# Altium PCB AltiumSTM32.PcbDoc
Units mm, origin at the board's own origin, x right, y up, seen from the top; angles counter-clockwise.
Board outline 36 x 37 mm, 4 copper layers (L1 (Signal), L2 (GND), L3 (GND), L4 (Signal)), stack 1.57 mm thick; 35 components, 27 nets, 172 pads, 111 vias.
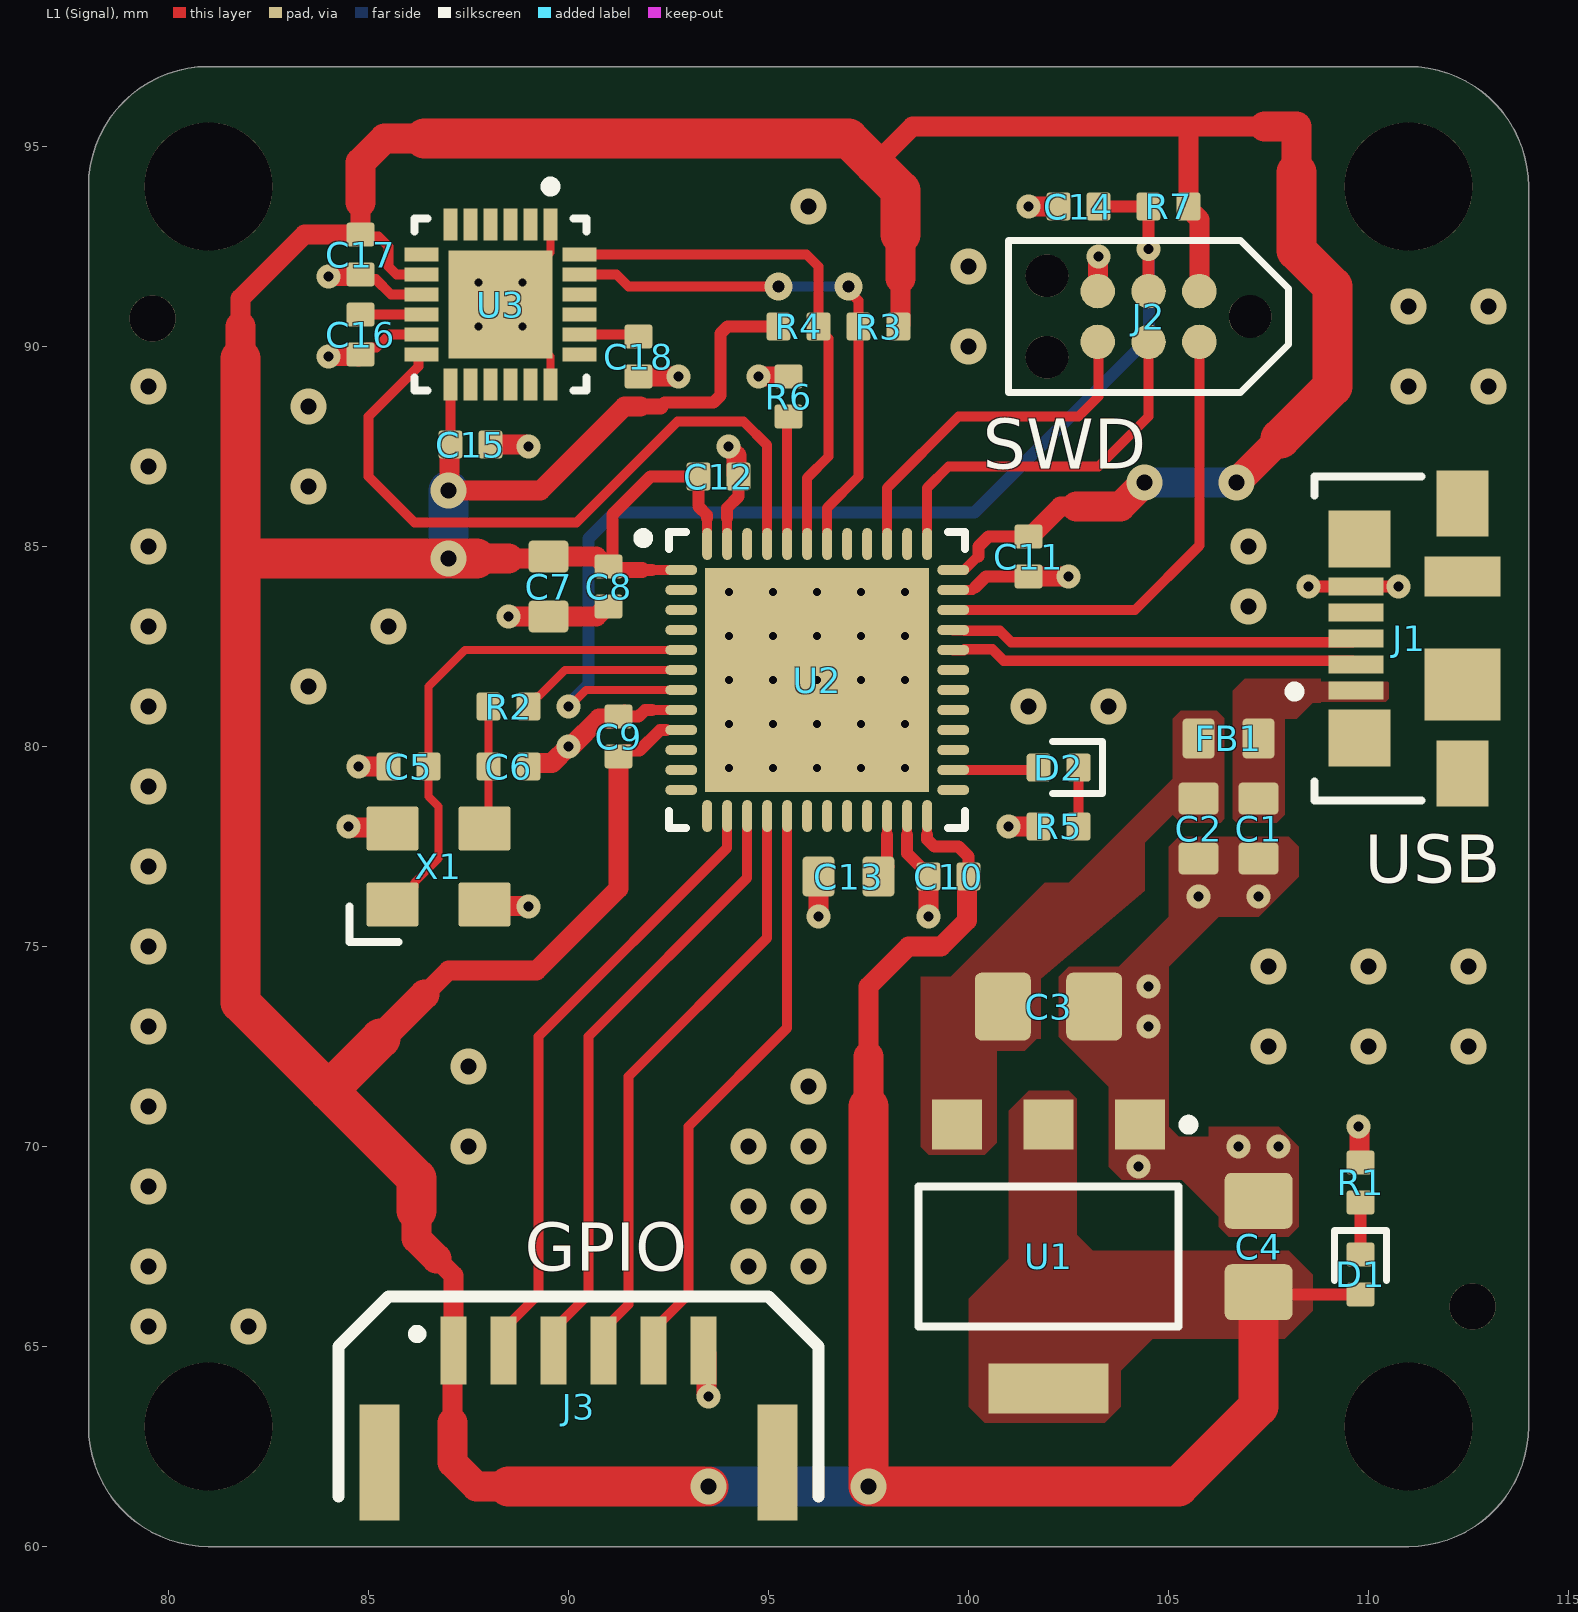
[diagram p0: L1 (Signal) view]
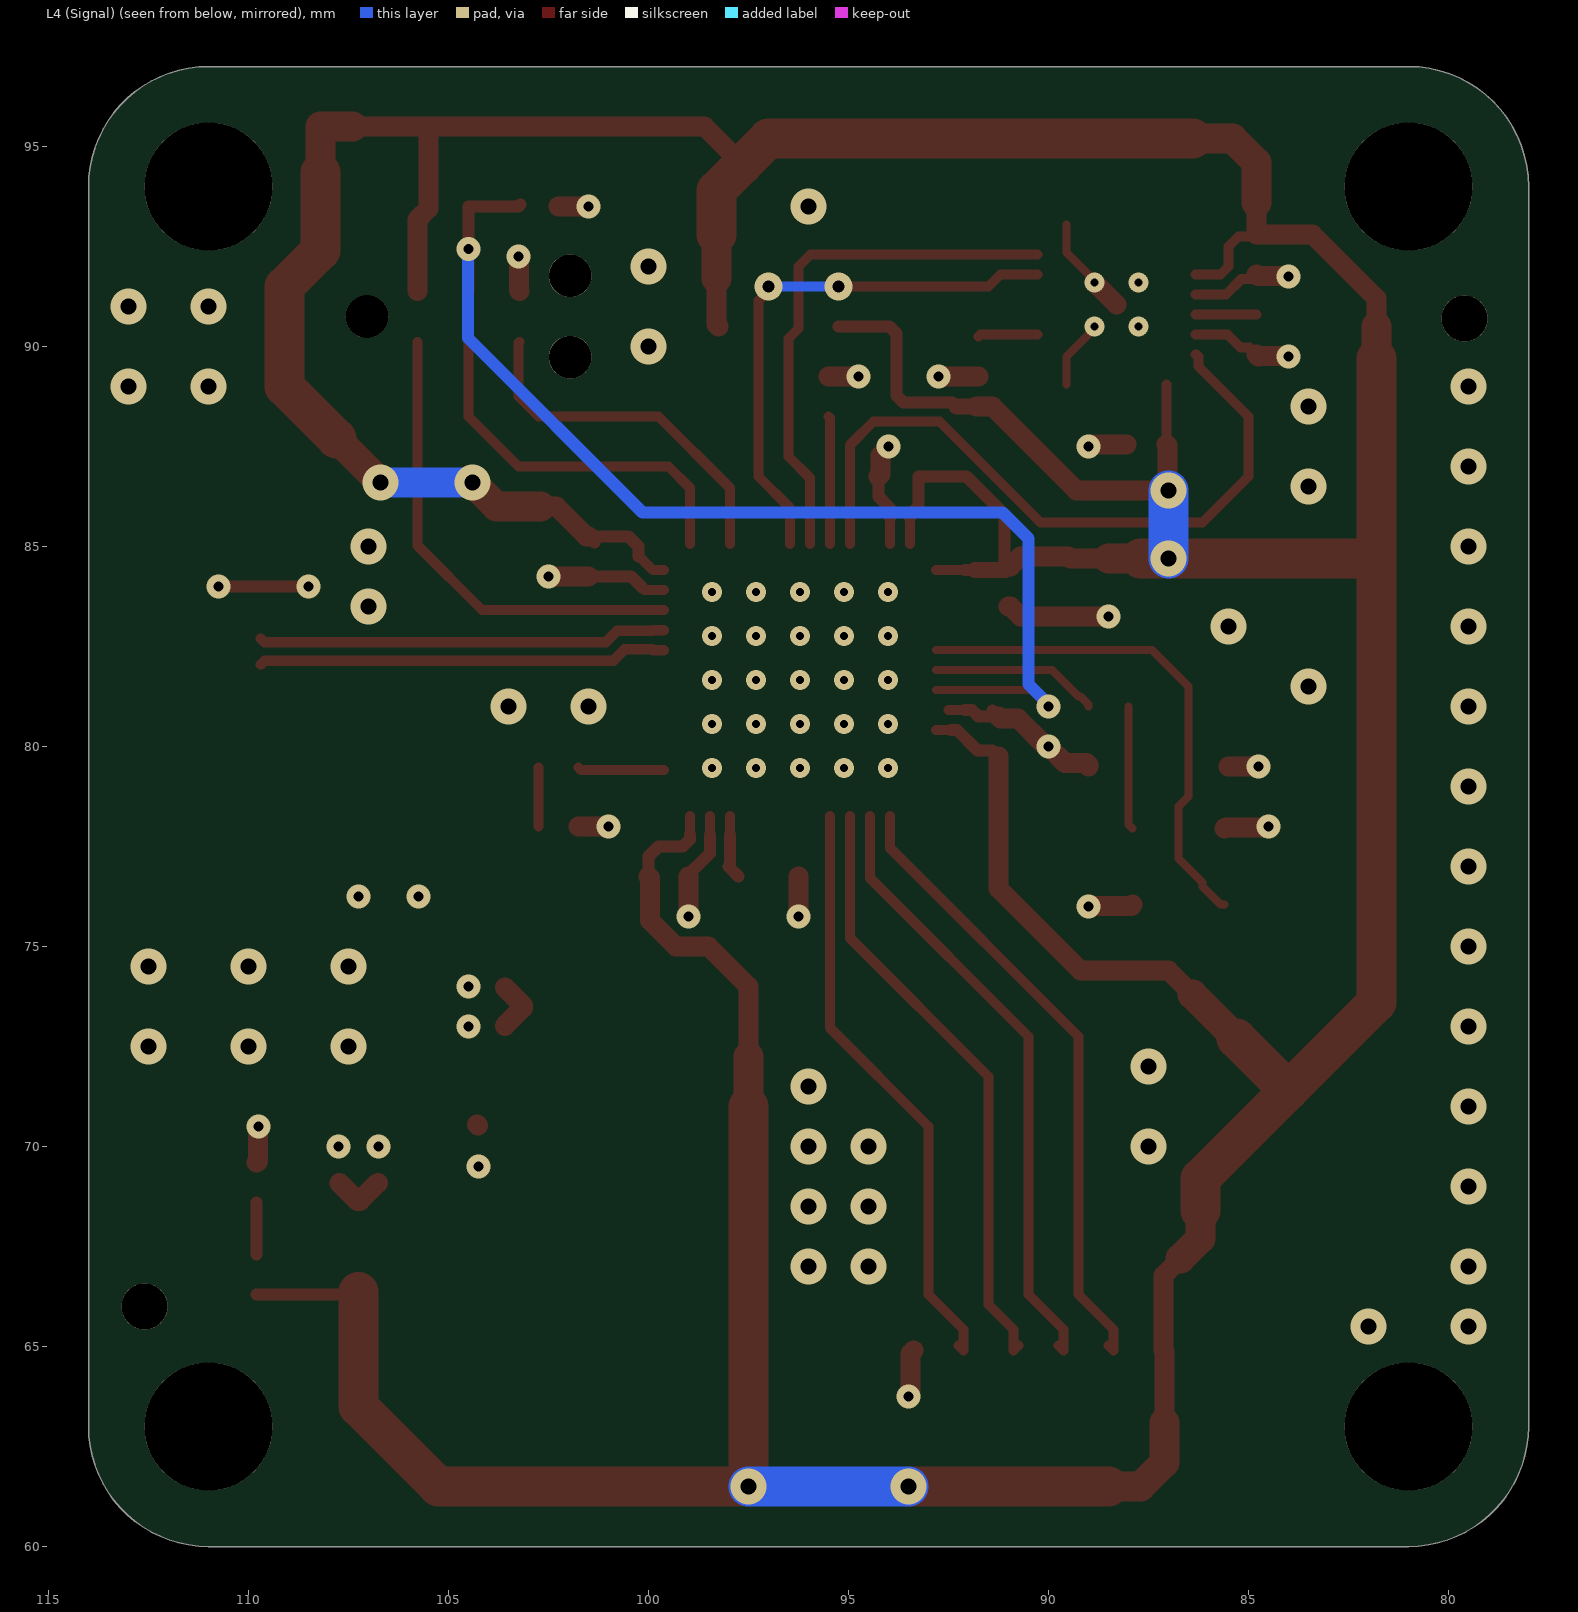
[diagram p1: L4 (Signal) view, seen from below]
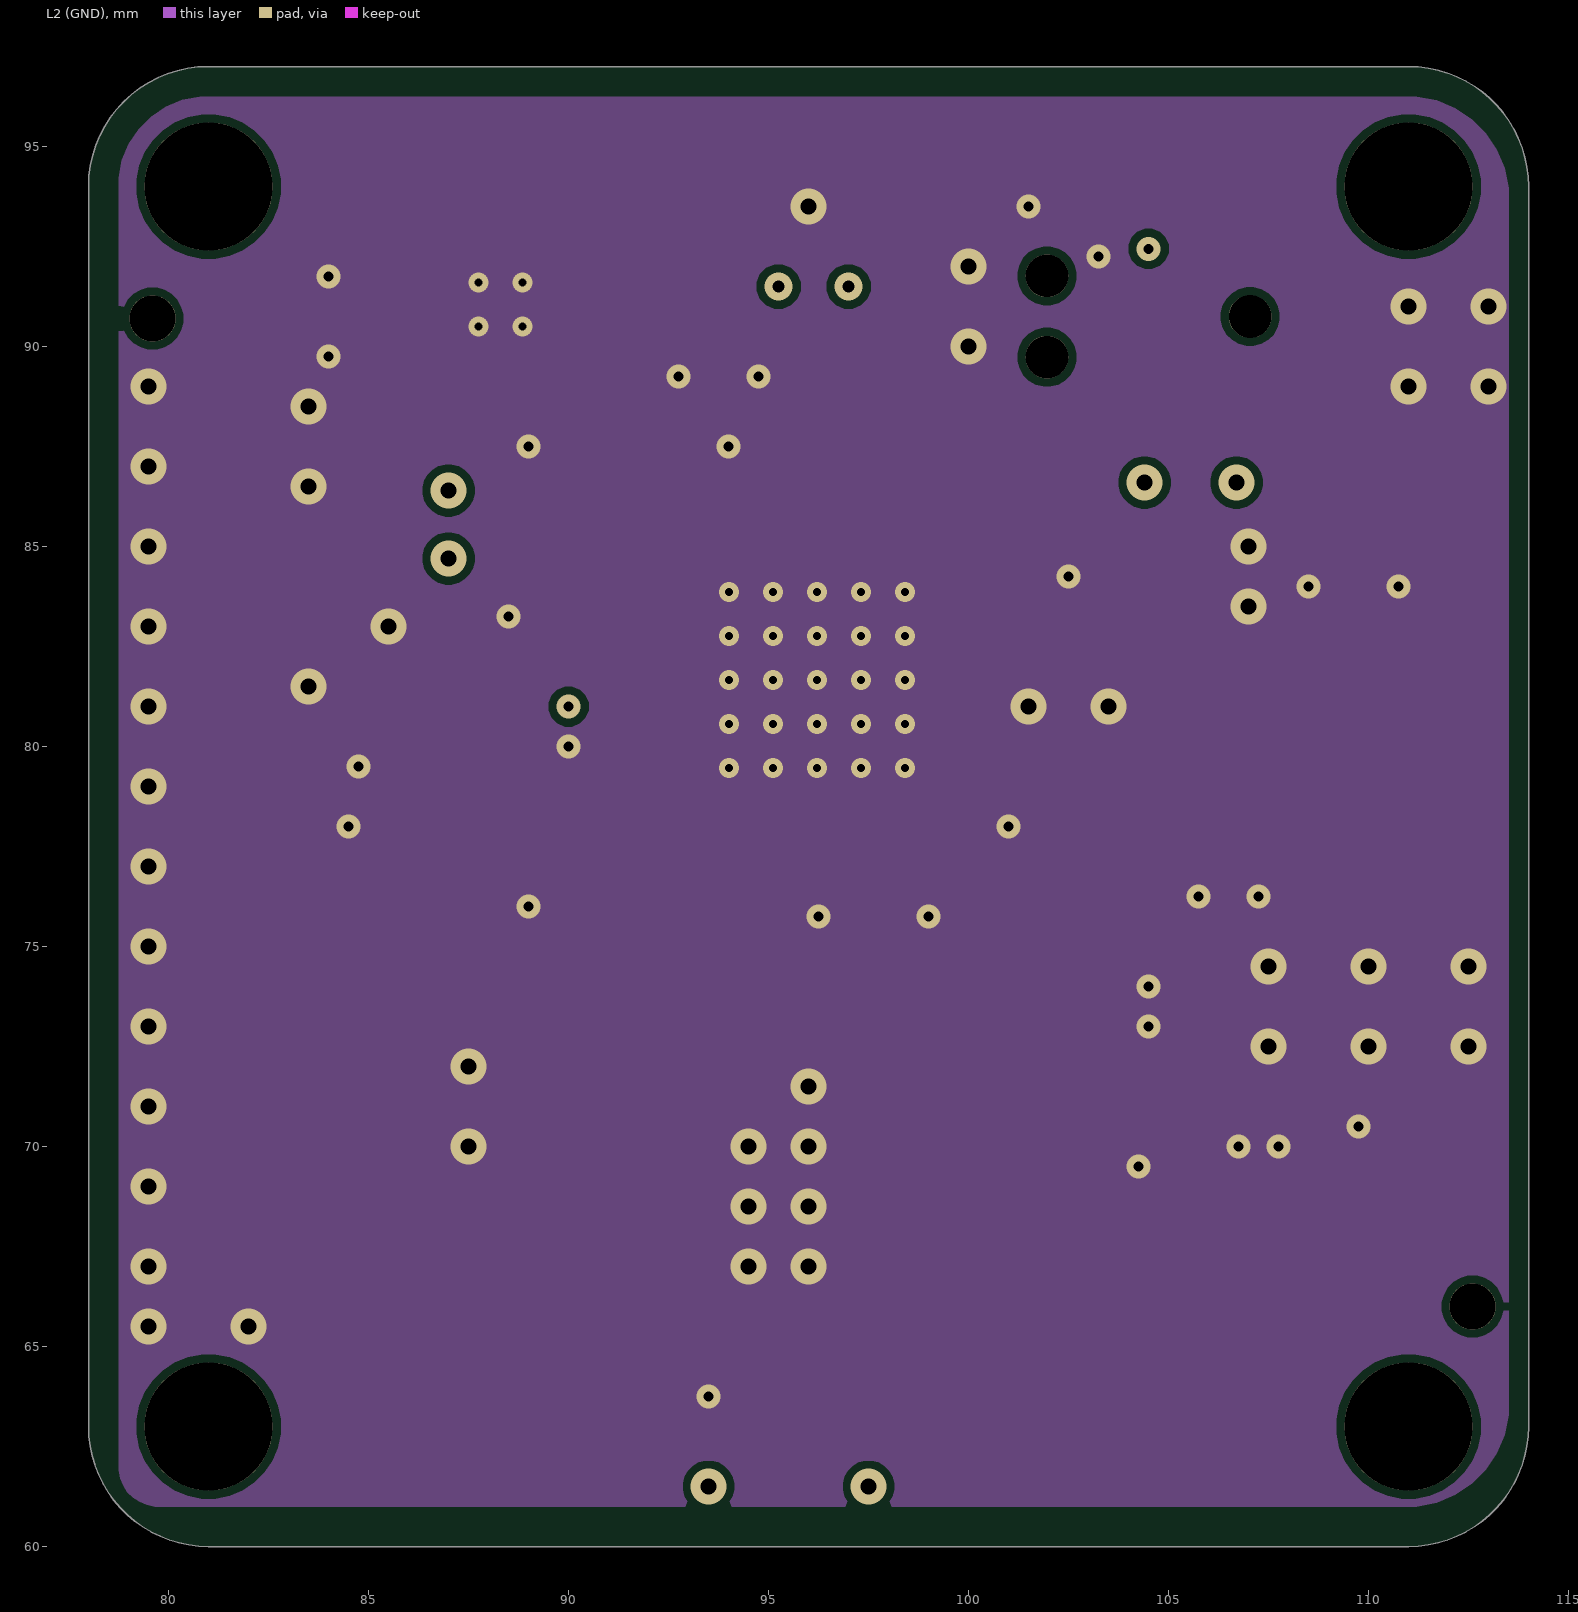
[diagram p2: L2 (GND)]
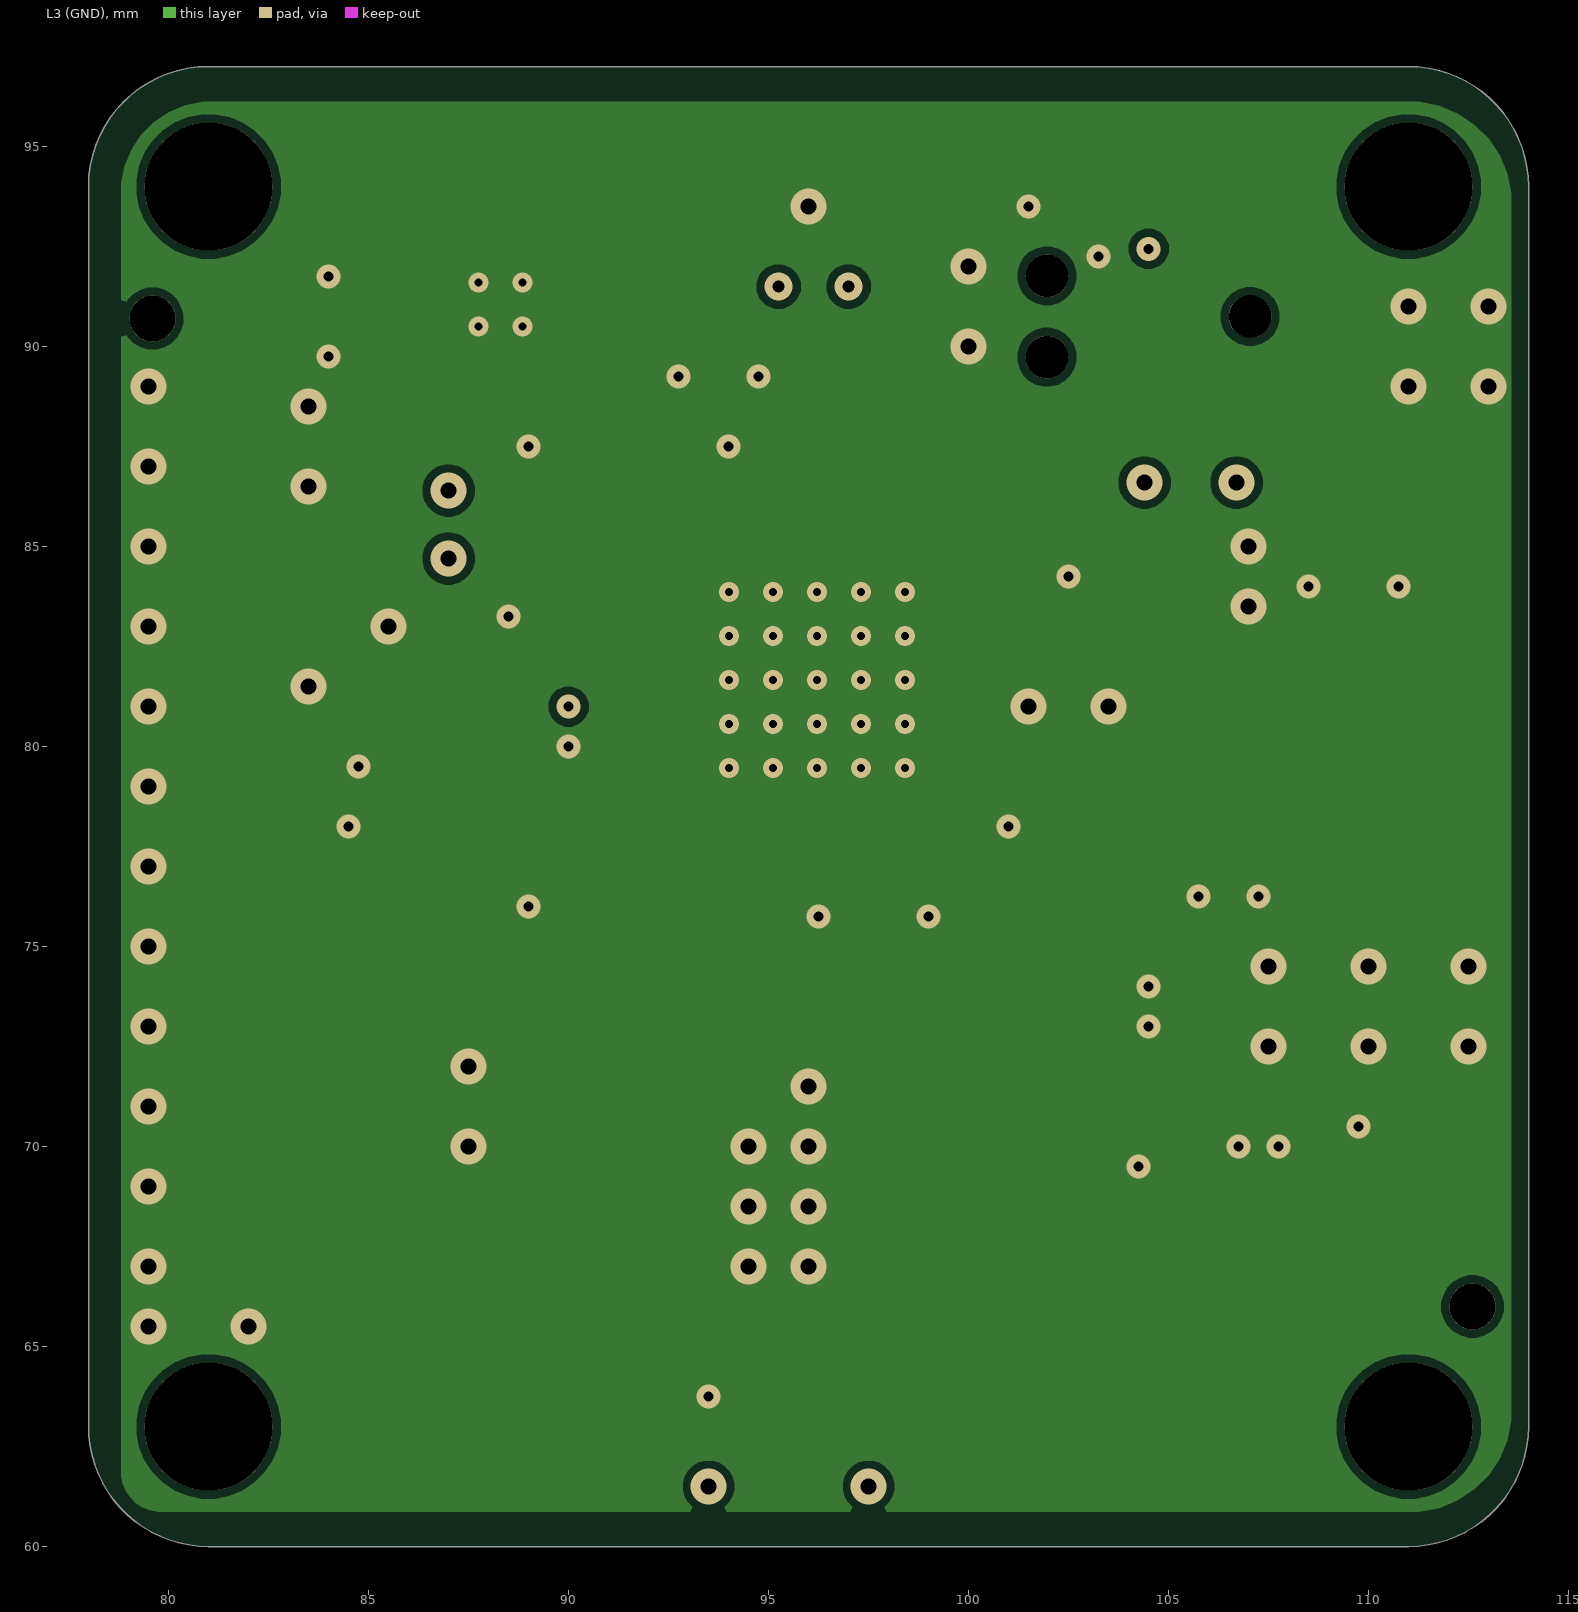
[diagram p3: L3 (GND)]
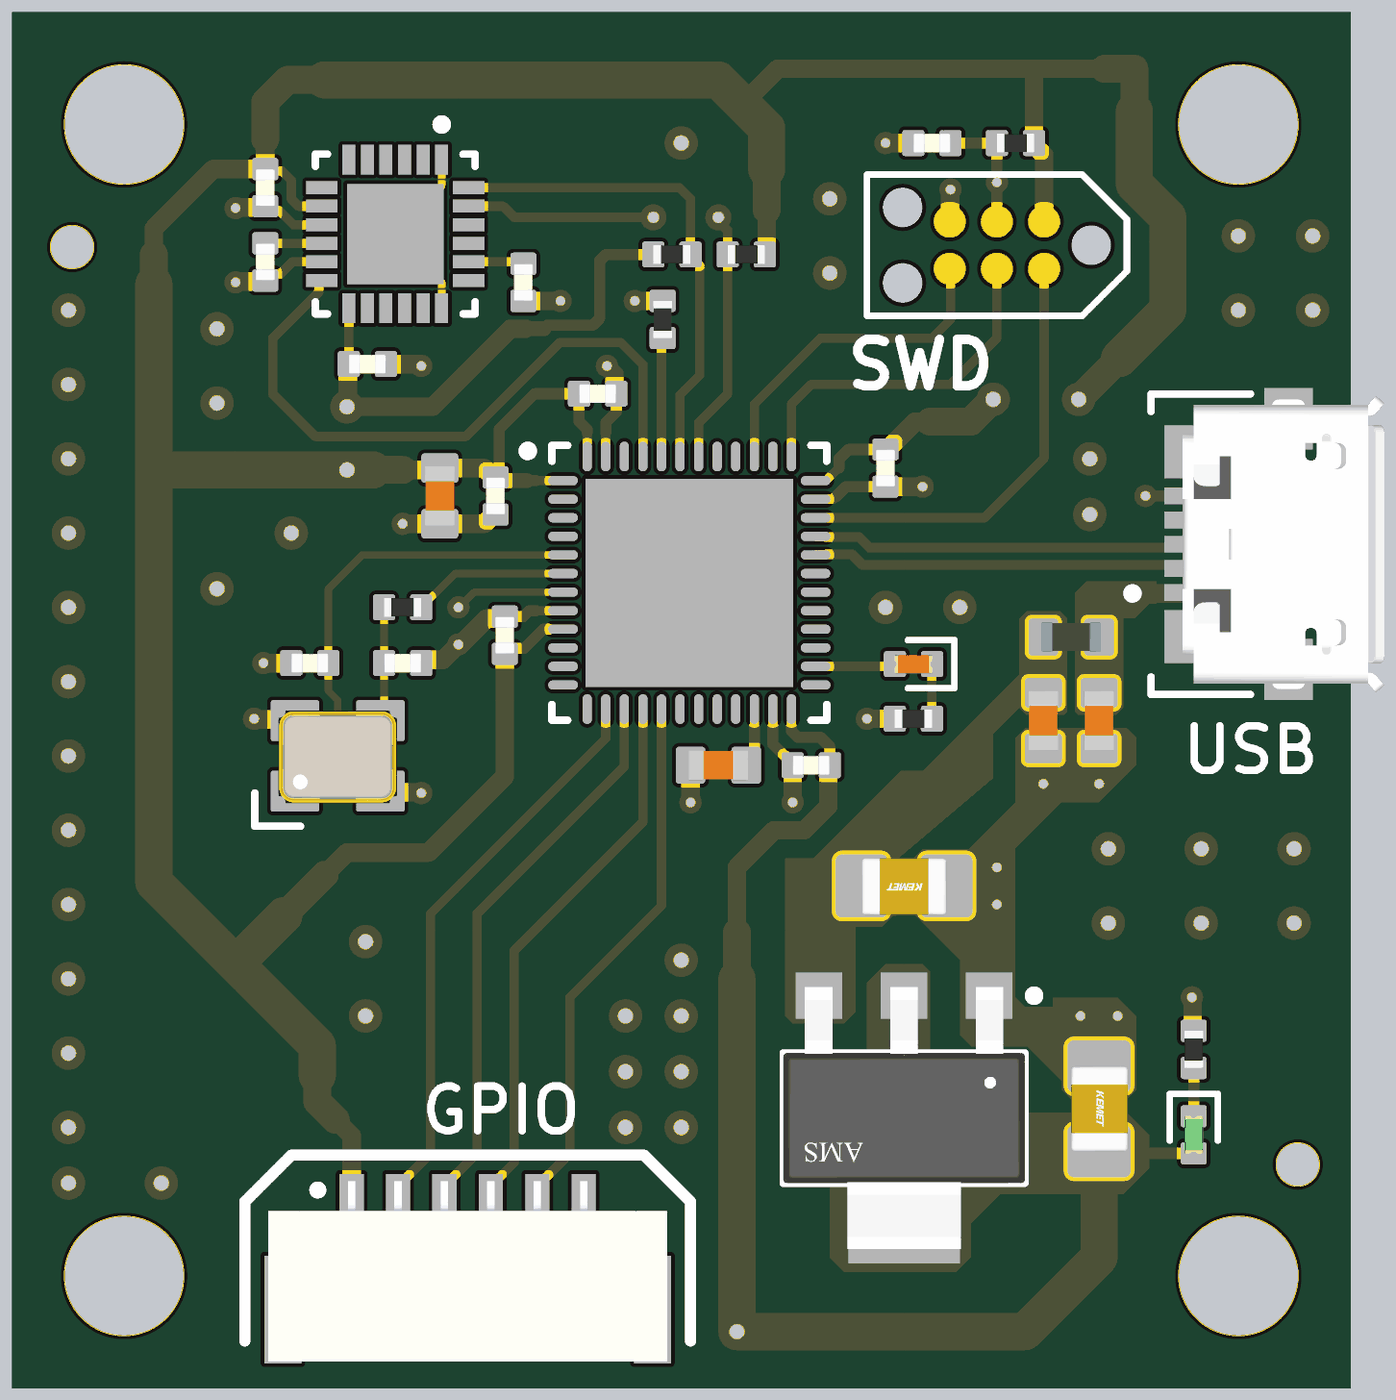
[diagram p4: 3D render of the assembled board from above, using the file's embedded part models]

## Layer stack, top to bottom
Top Solder: solder mask 0.0254, SM-001, Dk 4
L1 (Signal): signal copper 0.035
Dielectric 1: prepreg 0.2, PP-017, Dk 4.6
L2 (GND): signal copper 0.0175
Dielectric 3: core 1.065, Core-039, Dk 4.6
L3 (GND): signal copper 0.0175
Dielectric 5: prepreg 0.2, PP-017, Dk 4.6
L4 (Signal): signal copper 0.035
Bottom Solder: solder mask 0.0254, SM-001, Dk 4

## Board outline
78,63 ccw(c81,63) 81,60 111,60 ccw(c111,63) 114,63 114,94 ccw(c111,94) 111,97 81,97 ccw(c81,94) 78,94

## Design rules (kind name [scope] priority, off if disabled: settings)
Clearance [All] p1: gap=0.2 ignorepadtopadclearanceinfootprint=TRUE
DiffPairsRouting [All] p1: maxlimit=0.254 minlimit=0.203 mostfreqgap=0.254 toplayer_maxgap=0.203 toplayer_prefgap=0.203 toplayer_minwidth=0.26 toplayer_maxwidth=0.26 toplayer_prefwidth=0.26 bottomlayer_maxgap=0.203 bottomlayer_prefgap=0.203 bottomlayer_minwidth=0.26 bottomlayer_maxwidth=0.26 bottomlayer_prefwidth=0.26 impedanceprofiledriven=TRUE impedanceprofileid={A3C145BB-54D5-4342-A73E-C541DD987A4D} impedanceprofilevalue=90.000000 maxuncoupledlength=12.7
PolygonConnect [All] p1: connectstyle=Direct reliefconductorwidth=0.254 reliefentries=4 polygonreliefangle="90 Angle" airgapwidth=0.254
RoutingVias [All] p1: holewidth=0.3 width=0.7 viastyle="Through Hole" minholewidth=0.25 minwidth=0.55 maxholewidth=0.4 maxwidth=0.9
ShortCircuit [All] p1: allowed=TRUE
SolderMaskExpansion [All] p1: expansion=0.102 istentingtop=FALSE
UnRoutedNet [All] p1: checkbadconnections=TRUE
Width [All] p1: maxlimit=1 minlimit=0.2 preferedwidth=0.3 midlayer1_minwidth=0.254 midlayer1_maxwidth=0.254 midlayer1_prefwidth=0.254 midlayer2_minwidth=0.254 midlayer2_maxwidth=0.254 midlayer2_prefwidth=0.254 minimp=50.000000 maximp=50.000000 favimp=50.000000
27 further rules are at their usual default settings.

## Classes and differential pairs
differential pair USB_D: +USB_D_P -USB_D_N

## Components (designator, comment, footprint, x,y, rotation, side; value= is the part's Value field where it differs from the comment)
C1 "2u2" CAP_0603 107.25,77.95 r90 top
C2 "2u2" CAP_0603 105.75,77.95 r90 top
C3 "22u" CAP_0805 102,73.5 r180 top
C4 "22u" CAP_0805 107.25,67.5 r270 top
C5 "10p" CAP_0402 86,79.5 r0 top
C6 "10p" CAP_0402 88.5,79.5 r180 top
C7 "2u2" CAP_0603 89.5,84 r90 top
C8 "100n" CAP_0402 91,84 r90 top
C9 "100n" CAP_0402 91.25,80.25 r270 top
C10 "100n" CAP_0402 99.5,76.75 r0 top
C11 "100n" CAP_0402 101.5,84.75 r90 top
C12 "100n" CAP_0402 93.75,86.75 r180 top
C13 "2.2u" CAP_0603 97,76.75 r0 top
C14 "100n" CAP_0402 102.75,93.5 r0 top
C15 "100n" CAP_0402 87.55,87.55 r180 top
C16 "100n" CAP_0402 84.8,90.3 r90 top
C17 "10n" CAP_0402 84.8,92.3 r90 top
C18 "2n2" CAP_0402 91.75,89.75 r90 top
D1 "GREEN" LED_0402_GREEN 109.8,66.8 r90 top
D2 "RED" LED_0402_RED 102.254,79.473 r0 top
FB1 "120R" FB_0603 106.5,80.2 r180 top
J1 "473460001" FP-473460001-MFG 112,82.7 r90 top
J2 "TC2030-NL" TC2030-NL-FP 104.5,90.75 r180 top
J3 "SM06B-GHS-TB" SM06B-GHS-TB 90.25,63.5 r0 top
R1 "1k" RES_0402 109.8,69.1 r270 top
R2 "0R" RES_0402 88.5,81 r0 top
R3 "2k2" RES_0402 97.75,90.5 r0 top
R4 "2k2" RES_0402 95.75,90.5 r180 top
R5 "1k" RES_0402 102.25,78 r0 top
R6 "10k" RES_0402 95.5,88.75 r270 top
R7 "10k" RES_0402 105,93.5 r0 top
U1 "AMS1117-3.3" FP-AMS1117-IPC_C 102,67.25 r270 top
U2 "STM32F411CEU6" STM-UFQFPN48_L 96.218,81.661 r0 top
U3 "MPU-6050" IS-QFN-24_V 88.3,91.05 r270 top
X1 "24MHz" XTAL_3225 86.75,77 r0 top

## Footprints (in the part's own frame and the unit in brackets; to place one, negate y for a bottom-side part, rotate by r counter-clockwise, add the part's x,y. Pads: shape width x height; smd on the part's side, far side on the other; paste and mask are expansions set on the pad)
CAP_0402 [mm]
  rrect25% 0.6x0.7 smd: 1(-0.5,0) 2(0.5,0)
  body extent -0.5,-0.26 0.5,0.26, height 0.37
CAP_0603 [mm]
  rrect25% 0.8x1 smd: 1(-0.75,0) 2(0.75,0)
  body extent -0.8,-0.4 0.8,0.4, height 0.51
CAP_0805 [mm]
  rrect25% 1.4x1.7 smd: 1(-1.143,0) 2(1.143,0)
  body extent -1.15,-0.76 1.15,0.79, height 1.01
FB_0603 [mm]
  rrect25% 0.8x1 smd: 1(-0.75,0) 2(0.75,0)
  body extent -0.8,-0.4 0.8,0.4, height 0.81
FP-473460001-MFG [mm]
  rect 0.45x1.38 smd paste+0 mask+0: 1(-1.3,2.31) 2(-0.65,2.31) 3(0,2.31) 4(0.65,2.31) 5(1.3,2.31)
  rect 1.425x1.55 smd paste+0 mask+0: 6(-2.488,2.225) 7(2.488,2.225)
  rect 1.65x1.3 smd paste+0 mask+0: 8(-3.375,-0.35) 11(3.375,-0.35)
  rect 1.8x1.9 smd paste+0 mask+0: 9(-1.15,-0.35)
  rect 1x1.9 smd paste+0 mask+0: 10(1.55,-0.35)
  silkscreen extent -4.05,0.67 4.05,3.97, body extent -4.3,-2.48 4.3,3.45, height 0.25
FP-AMS1117-IPC_C [mm]
  rect 1.25x1.25 smd paste+0 mask+0: 1(-3.295,2.29) 2(-3.295,0) 3(-3.295,-2.29)
  rect 1.25x3 smd paste+0 mask+0: 4(3.295,0)
  silkscreen extent -3.42,-3.25 1.75,3.63, body extent -3.9,-3.35 3.9,3.35, height 0.25
IS-QFN-24_V [mm] "QFN, 24-Leads, Body 4x4mm, Pitch 0.5mm, Thermal Pad 2.7x2.6mm"
  rect 0.8x0.35 smd: 1(-2,1.25) 2(-2,0.75) 3(-2,0.25) 4(-2,-0.25) 5(-2,-0.75) 6(-2,-1.25) 13(2,-1.25) 14(2,-0.75) 15(2,-0.25) 16(2,0.25) 17(2,0.75) 18(2,1.25)
  rect 0.35x0.85 smd mask+0.102: 7(-1.25,-1.975) 8(-0.75,-1.975) 9(-0.25,-1.975) 10(0.25,-1.975) 11(0.75,-1.975) 12(1.25,-1.975) 19(1.25,1.975) 20(0.75,1.975) 21(0.25,1.975) 22(-0.25,1.975) 23(-0.75,1.975) 24(-1.25,1.975)
  rect 2.7x2.6 smd: 25(0,0)
  silkscreen extent -3.07,-2.15 2.15,2.15, body extent -2,-2 2,2, height 0.95
LED_0402_GREEN [mm]
  rrect25% 0.6x0.7 smd: A(-0.5,0) K(0.5,0)
  silkscreen extent -0.15,-0.65 1.1,0.65, body extent -0.51,-0.25 0.51,0.25, height 0.45
LED_0402_RED [mm]
  rrect25% 0.6x0.7 smd: A(-0.5,0) K(0.5,0)
  silkscreen extent -0.15,-0.65 1.1,0.65, body extent -0.51,-0.25 0.51,0.25, height 0.45
RES_0402 [mm]
  rrect25% 0.6x0.7 smd: 1(-0.5,0) 2(0.5,0)
  body extent -0.5,-0.25 0.5,0.25, height 0.3
SM06B-GHS-TB [mm]
  rect 0.65x1.7 smd: 1(-3.125,1.4) 2(-1.875,1.4) 3(-0.625,1.4) 4(0.625,1.4) 5(1.875,1.4) 6(3.125,1.4)
  rect 1x2.9 smd: ""(-4.975,-1.4) ""(4.975,-1.4)
  silkscreen extent -6,-2.25 6,2.75, body extent -5.38,-2.8 5.38,2.05, height 4.26
STM-UFQFPN48_L [mm] "QFN, 48-Leads, Body 7.1x7.1mm, Pitch 0.5mm, Thermal Pad 5.6x5.6mm, IPC High Density"
  oval 0.8x0.25 smd: 1(-3.4,2.75) 2(-3.4,2.25) 3(-3.4,1.75) 4(-3.4,1.25) 5(-3.4,0.75) 6(-3.4,0.25) 7(-3.4,-0.25) 8(-3.4,-0.75) 9(-3.4,-1.25) 10(-3.4,-1.75) 11(-3.4,-2.25) 12(-3.4,-2.75) 25(3.4,-2.75) 26(3.4,-2.25) 27(3.4,-1.75) 28(3.4,-1.25) 29(3.4,-0.75) 30(3.4,-0.25) 31(3.4,0.25) 32(3.4,0.75) 33(3.4,1.25) 34(3.4,1.75) 35(3.4,2.25) 36(3.4,2.75)
  oval 0.25x0.8 smd: 13(-2.75,-3.4) 14(-2.25,-3.4) 15(-1.75,-3.4) 16(-1.25,-3.4) 17(-0.75,-3.4) 18(-0.25,-3.4) 19(0.25,-3.4) 20(0.75,-3.4) 21(1.25,-3.4) 22(1.75,-3.4) 23(2.25,-3.4) 24(2.75,-3.4) 37(2.75,3.4) 38(2.25,3.4) 39(1.75,3.4) 40(1.25,3.4) 41(0.75,3.4) 42(0.25,3.4) 43(-0.25,3.4) 44(-0.75,3.4) 45(-1.25,3.4) 46(-1.75,3.4) 47(-2.25,3.4) 48(-2.75,3.4)
  rect 5.6x5.6 smd: 49(0,0)
  silkscreen extent -4.47,-3.7 3.7,3.7, body extent -3.55,-3.55 3.55,3.55, height 0.6
TC2030-NL-FP [mil]
  round 33.98 smd paste-16.99: 1(-50,-25) 2(-50,25) 3(0,-25) 4(0,25) 5(50,-25) 6(50,25)
  round 42.01 hole 42.01 unplated: MH(-100,0) MH(100,-40) MH(100,40)
  silkscreen extent -138,-75 138,75
XTAL_3225 [mm]
  rrect10% 1.3x1.1 smd: 1(-1.15,-0.95) 2(1.15,-0.95) 3(1.15,0.95) 4(-1.15,0.95)
  silkscreen extent -2.23,-1.89 -1,-1, body extent -1.6,-1.28 1.6,1.22, height 0.61

## Part data
C1 C2 C7 C13: library part CAP_0603, "Capacitor SMD 0603"
C3 C4: library part CAP_0805, "Capacitor SMD 0805"
C5 C6 C8 C9 C10 C11 C12 C14 C15 C16 C17 C18: library part CAP_0402, "Capacitor SMD 0402"
D1: library part LED_0402_GREEN, "LED 0402 GREEN SMD"
D2: library part LED_0402_RED, "LED 0402 RED SMD"
FB1: library part FB_0603, "Ferrite Bead SMD 0603"
J1: library part CMP-2000-05246-2, "CONN RCPT USB2.0 MICRO B SMD R/A", Current Rating=1.8A, Manufacturer=Molex, Package=0, Temperature="-30°C to +85°C", Temperature Range High=+85°C, Temperature Range Low=-30°C, Voltage Rating=30V, Automotive=No, Category=Conn, ComponentLink2Description=Datasheet, ComponentLink2URL=https://www.molex.com/webdocs/datasheets/pdf/en-us/0473460001_IO_CONNECTORS.pdf, Conn Orientation="Right Angle", Contact Material=Gold,Nickel, Device Class L1=Connectors, Device Class L2="USB Connectors", Device Class L3=unset, Digikey Description="CONN RCPT USB2.0 MICRO B SMD R/A", Footprint Url=https://www.molex.com/pdm_docs/sd/473460001_sd.pdf, Height=2.945mm, Is Female=yes, Lead Free=Yes, Manufacturer Part Number=473460001, Number Of Contacts=5, Octopart=https://octopart.com/47346-0001-molex-7164928, Pitch=0.65mm, RoHS=TRUE, Shielding=true, Usb Standard="USB 2.0"
J2: "Tag-Connect No-Solder SWD Debug Connector (No Legs) DO NOT PLACE", Manufacturer=Tag-Connect, Manufacturer Part Number=TC2030-NL-FP
J3: "Header Connector 6 Position 1.25MM Pitch SMD Horizontal JST GH", Manufacturer=JST, Manufacturer Part Number=SM06B-GHS-TB
R1 R2 R3 R4 R5 R6 R7: library part RES_0402, "Resistor SMD 0402"
U1: library part CMP-209535-000001-1, "LDO Voltage Regulators 1A, 3.3V", Dropout Voltage=1.1V, Manufacturer="Advanced Monolithic Systems", Max Junction Temp=+125°C, Max Power Dissipation=1.2W, Max Supply Voltage=15V, Nominal Supply Current=5mA, Output Current=1A, Output Voltage=3.3V, Package=AMS1117, Temperature="-40°C to +125°C", Temperature Range Low=-40°C, Automotive=No, Category=IC, ComponentLink2Description=Datasheet, ComponentLink2URL=http://www.advanced-monolithic.com/pdf/ds1117.pdf, Device Class L1="Integrated Circuits (ICs)", Device Class L2="Power Management ICs", Device Class L3="Voltage Regulators - Linear", Height=1.8mm, Ipc Land Pattern Name=SOT229P700X180-4, Lead Free=Yes, Manufacturer Part Number=AMS1117-3.3, Number Of Outputs=1, Octopart=https://octopart.com/ams1117-3.3-advanced+monolithic+systems-25899300, Output Type=Fixed, RoHS=TRUE, Standoff Height=0.64mm, Temperature Range High=+125°C
U2: library part CMP-0243-00165-1, "ARM Cortex-M4 32-bit MCU+FPU, 512 KB Flash, 128 KB RAM, 36 I/Os, 48-Pin UFQFPN, -40 to 85 degC, Tray", I/Os (High Current)=36, Operating Frequency(F) (Processor speed) (MHz)=100, Package Description=UFQFPN48, Package Reference="48-Pin Ultra Thin Fine Pitch Quad Flat No-Lead, 7 x 7 x 0.6 mm Body, 0.5 mm Pitch, Exposed Pad", Supply Voltage(Vcc) min (V)=1.7, ComponentLink1Description="Manufacturer URL", ComponentLink1URL=http://www.st.com/, ComponentLink2Description=Datasheet, ComponentLink2URL=http://www.st.com/st-web-ui/static/active/en/resource/technical/document/datasheet/DM00115249.pdf, Core="ARM Cortex-M4", DatasheetVersion="Rev. 6", FLASH Size (Prog) (kB)=512, Internal RAM Size (kB)=128, Mounting Technology="Surface Mount", Packing=Tray
U3: library part CMP-1753-00002-2, "3-Axis Gyroscope, Accelerometer and a Digital Motion Processor(TM) (DMP), 2.375 to 3.46 V, -40 to 85 degC, 24-Pin QFN, RoHS, Tape and Reel", Manufacturer=InvenSense, Standard Package=5,000, Category=Sensors,Transducers, Datasheet URL=http://datasheet.octopart.com/MPU-6050-InvenSense-datasheet-14421344.pdf, Datasheet Version="Rev. 3.3, 05/2012", Dynamic Catalog=MPU-6000™Series, Family=Multifunction, Featured Product=MPU-60506-Axis,IntegratedI²CSolution, Manufacturer URL=http://www.invensense.com/, Online Catalog=MPU-6000™Series, Other Names="1428-1007-2 / MPU6050", Output Type=Digital, Sensor Type=MotionTracking, Unit PriceUSD=Digital
X1: library part TSX-3225_24.0000MF15X-AC, "Crystal SMD 24MHz 10PPM 7pF 3225", Manufacturer=Epson, Manufacturer Part Number="TSX-3225 24.0000MF15X-AC"

## Free pads (board coordinates)
  round 3.2 hole 3.2: MH(81,63) MH(81,94) MH(111,63) MH(111,94)
  round 1.152 hole 1.152: TH(79.6,90.7) TH(112.6,66)

## Via types
v1: diameter 0.9, hole 0.4, L1 (Signal) to L4 (Signal), tented both sides, 50 vias
v2: diameter 0.6, hole 0.25, L1 (Signal) to L4 (Signal), tented both sides, 30 vias
v3: diameter 0.5, hole 0.2, L1 (Signal) to L4 (Signal), 29 vias
v4: diameter 0.7, hole 0.3, L1 (Signal) to L4 (Signal), tented both sides, 2 vias

## Nets (pads, with @x,y where several pads share a name; then routed paths per layer and width w, separated by ;. In a path a pad name is that pad's centre, name@x,y a point inside that pad or via, vN(x,y) a via of type N, cw(c..) or ccw(c..) an arc to the next point about the centre after c; other vN are vias at no path point)
+3V3: C4.2 C7.2 C8.2 C9.2 C10.2 C11.2 C12.2 C15.2 C17.2 D1.A J2.1 J3.1 R3.2 R4.2 R7.2 U1.2 U1.4 U2.1 U2.9 U2.24 U2.36 U2.48 U3.8 U3.13 | length 182.7
  L1 (Signal) w0.25: C17.2 84.85,92.75 85.25,92.75 85.5,92.5 85.5,92 85.7,91.8 U3.8 ; C15.2 U3.13 ; 92.089,84.411 U2.1 ; U2.9@92.435,80.411 U2.9 ; U2.48 93.468,85.718 ; 98.968,77.782 U2.24 ; U2.36 99.893,84.411 100.232,84.75 100.25,84.75
  L1 (Signal) w0.3: C8.2@90.95,84.5 91.1,84.65 91.1,85.8 92.05,86.75 C12.2 93.25,86 93.468,85.782 93.468,85.718 ; C9.2 91.4,79.9 91.775,79.9 92.286,80.411 U2.9@92.435,80.411 ; 91.839,84.411 92.089,84.411 ; 92.3,88.5 92.4,88.6 93.624,88.6 93.8,88.776 93.8,90.324 93.976,90.5 R4.2 ; 98.968,77.782 98.968,77.676 99.144,77.5 99.75,77.5 100,77.25 C10.2 C10.2@100,76.8 ; 100.25,84.75 100.25,85 100.5,85.25 C11.2@101.35,85.25 ; C11.2@101.35,85.1 C11.2 ; C4.2 107.307,66.3 D1.A
  L1 (Signal) w0.4: C8.2 91.089,84.411 91.839,84.411 ; 91.8,88.5 92.3,88.5
  L1 (Signal) w0.5: 81.8,90.5 81.8,91.2 83.4,92.8 C17.2 84.8,93.6 ; 86.4,73.8 87,74.4 89.2,74.4 91.25,76.45 C9.2 ; 86.7,67.2 87.125,66.775 J3.1 87.1,64.875 87.1,63.1 ; C15.2 87.025,87.525 87.025,86.425 v1(87,86.4) 89.3,86.4 91.4,88.5 91.8,88.5 ; 88.5,84.7 89.45,84.7 C7.2 90.7,84.75 90.95,84.5 C8.2 ; 97.5,72.25 97.5,74 98.5,75 99.311,75 99.961,75.65 99.961,76.711 C10.2 ; 97.65,94.55 98.6,95.5 105.5,95.5 ; R3.2 98.3,90.55 98.3,91.7 ; C11.2 101.55,85.25 102.3,86 102.7,86 ; J2.1 105.77,93.18 105.5,93.45 R7.2 105.5,95.5 ; 107.4,95.5 105.5,95.5
  L1 (Signal) w0.75: 81.8,89.7 81.8,90.5 ; 84.8,93.6 84.8,94.6 85.4,95.2 86.4,95.2 ; 85.3,72.7 86.4,73.8 ; 86.2,68.4 86.2,67.7 86.7,67.2 ; 87.1,63.1 87.1,62.1 87.7,61.5 88.5,61.5 ; 87.7,84.7 88.5,84.7 ; 97.5,71 97.5,72.25 ; 98.3,91.7 98.3,92.8 ; 102.7,86 103.8,86 v1(104.4,86.6) ; v1(106.7,86.6) 107.8,87.7 ; 107.4,95.5 108.2,95.5 108.2,94.354
  L1 (Signal) w1: 81.8,89.7 81.8,84.7 ; 85.3,72.7 84,71.4 ; 86.2,68.4 86.2,69.2 84,71.4 ; 86.4,95.2 97,95.2 97.65,94.55 98.3,93.9 98.3,92.8 ; 87.7,84.7 v1(87,84.7) 81.8,84.7 ; 88.5,61.5 v1(93.5,61.5) ; 97.5,71 v1(97.5,61.5) 105.25,61.5 107.25,63.5 C4.2 ; 107.8,87.7 109.1,89 109.1,91.5 108.2,92.4 108.2,94.354 ; 81.8,84.7 81.8,73.6 84,71.4
  L4 (Signal) w0.75: v1(104.4,86.6) v1(106.7,86.6)
  L4 (Signal) w1: v1(87,84.7) v1(87,86.4) ; v1(93.5,61.5) v1(97.5,61.5)
+5V: C2.2 C3.2 FB1.2 U1.3
GND: C1.1 C2.1 C3.1 C4.1 C5.1 C6.1 C7.1 C8.1 C9.1 C10.1 C11.1 C12.1 C13.1 C14.1 C15.1 C16.1 C17.1 C18.1 J1.5 J2.5 J3.6 R1.1 R5.1 R6.1 U1.1 U2.8 U2.23 U2.35 U2.47 U2.49 U3.1 U3.9 U3.11 U3.18 U3.25 X1.2 X1.4 | length 41
  L1 (Signal) w0.2: v3(88.85,90.5) 88.85,90.45 89.55,89.75 U3.18 ; v3(88.85,91.6) 88.85,91.65 89.55,92.35 U3.1
  L1 (Signal) w0.25: C16.1 84.975,89.975 85.2,89.975 85.525,90.3 U3.11 ; C17.1 84.918,91.682 85.182,91.682 85.564,91.3 U3.9 ; 92.089,80.911 U2.8@92.5,80.911 ; U2.47 93.968,85.718 ; 98.468,77.782 U2.23 ; U2.35 100.097,83.911 100.161,83.975
  L1 (Signal) w0.3: C9.1@91.4,80.9 C9.1 91.75,80.75 91.911,80.911 92.089,80.911 ; 93.968,85.718 93.968,85.968 94.25,86.25 C12.1 ; 98.468,77.782 98.468,77.325 98.793,77 98.8,77 99,76.8 C10.1 ; 100.161,83.975 100.436,84.25 C11.1 ; v2(108.5,84) J1.5 v2(110.75,84)
  L1 (Signal) w0.5: v2(84,89.75) 84.019,89.769 C16.1@84.769,89.769 ; v2(84,91.75) 84.019,91.769 84.769,91.769 C17.1 ; v2(84.5,78) 84.519,77.981 85.569,77.981 X1.4 ; v2(84.75,79.5) C5.1 ; C16.1@84.75,89.75 C16.1@84.769,89.769 ; C16.1 C16.1@84.769,89.769 ; X1.2 87.931,76.019 88.981,76.019 v2(89,76) ; C15.1 88.923,87.55 88.973,87.5 v2(89,87.5) ; U3.25 v3(88.85,91.6) ; v2(88.5,83.25) C7.1 90.7,83.25 90.95,83.5 C8.1 ; C6.1 89,79.533 89.05,79.583 89.583,79.583 v2(90,80) 90.019,80.019 90.08,80.019 90.761,80.7 91.2,80.7 C9.1 ; C18.1 v2(92.75,89.25) ; J3.6 93.45,64.825 93.45,63.827 93.5,63.777 v2(93.5,63.75) ; v2(94,87.5) 94,87.473 94.2,87.273 94.2,86.8 C12.1 ; v2(94.75,89.25) R6.1 ; v2(96.25,75.75) C13.1 ; v2(99,75.75) C10.1 ; v2(101,78) R5.1 ; C11.1 v2(102.5,84.25) ; v2(101.5,93.5) C14.1 ; J2.5 103.24,91.395 103.24,92.24 v2(103.25,92.25) ; C3.1@103.593,73.019 103.143,73.469 C3.1 103.143,73.531 C3.1@103.593,73.981 ; v2(104.25,69.5) v2@104.269,69.519 ; U1.1@104.269,70.524 U1.1 ; v2@104.481,73.019 v2(104.5,73) ; v2@104.481,73.981 v2(104.5,74) ; v2(106.75,70) v2@106.769,69.981 ; C4.1@106.769,69.093 107.219,68.643 C4.1 107.281,68.643 C4.1@107.731,69.093 ; v2@107.731,69.981 v2(107.75,70) ; v2(109.75,70.5) 109.769,70.481 109.769,69.631 R1.1
  other v1: 79.5,65.5 82,65.5 79.5,67 94.5,67 96,67 94.5,68.5 96,68.5 79.5,69 87.5,70 94.5,70 96,70 79.5,71 96,71.5 87.5,72 107.5,72.5 110,72.5 112.5,72.5 79.5,73 107.5,74.5 110,74.5 112.5,74.5 79.5,75 79.5,77 79.5,79 79.5,81 101.5,81 103.5,81 83.5,81.5 79.5,83 85.5,83 107,83.5 79.5,85 107,85 83.5,86.5 79.5,87 83.5,88.5 79.5,89 111,89 113,89 100,90 111,91 113,91 100,92 96,93.5
  other v2: 105.75,76.25 107.25,76.25
  other v3: 94.018,79.461 95.118,79.461 96.218,79.461 97.318,79.461 98.418,79.461 94.018,80.561 95.118,80.561 96.218,80.561 97.318,80.561 98.418,80.561 94.018,81.661 95.118,81.661 96.218,81.661 97.318,81.661 98.418,81.661 94.018,82.761 95.118,82.761 96.218,82.761 97.318,82.761 98.418,82.761 94.018,83.861 95.118,83.861 96.218,83.861 97.318,83.861 98.418,83.861 87.75,90.5 87.75,91.6
IMU_CPOUT: C18.2 U3.20 | length 1.5
  L1 (Signal) w0.25: U3.20 91.7,90.3 C18.2
IMU_INT: U2.45 U3.12 | length 17.8
  L1 (Signal) w0.25: U3.12 86.3,89.8 86.25,89.75 86.25,89.5 85,88.25 85,86.75 86.15,85.6 90.2,85.6 92.725,88.125 94.375,88.125 94.968,87.532 U2.45
IMU_REGOUT: C16.2 U3.10 | length 1.5
  L1 (Signal) w0.25: C16.2 U3.10
IMU_SCL: R3.1 U2.42 U3.23 | length 13.7
  L1 (Signal) w0.25: U3.23 91.2,91.8 91.5,91.5 v4(95.25,91.5) ; U2.42 96.468,85.968 97.25,86.75 R3.1 97.25,91.146 97,91.396 v4(97,91.5)
  L4 (Signal) w0.25: v4(95.25,91.5) v4(97,91.5)
IMU_SDA: R4.1 U2.43 U3.24 | length 13.4
  L1 (Signal) w0.25: U3.24 95.95,92.3 96.25,92 R4.1 96.25,90.45 96.5,90.2 96.5,87.25 95.968,86.718 U2.43
LED_PWR_K: D1.K R1.2 | length 1.3
  L1 (Signal) w0.3: D1.K R1.2
MCU_BOOT0: R6.2 U2.44 | length 3.2
  L1 (Signal) w0.25: U2.44 95.468,88.218 R6.2
MCU_LED_A: D2.A U2.26 | length 2.2
  L1 (Signal) w0.25: U2.26 101.692,79.411 D2.A
MCU_LED_K: D2.K R5.2 | length 1.5
  L1 (Signal) w0.25: R5.2 102.752,78.002 102.752,79.471 D2.K
MCU_NRST: C14.2 J2.3 R7.1 U2.7 | length 29.2
  L1 (Signal) w0.2: v2(90,81) 90.027,81 90.438,81.411 U2.7
  L1 (Signal) w0.3: C14.2@103.2,93.55 C14.2 R7.1 v2(104.5,92.443) J2.3
  L4 (Signal) w0.3: v2(90,81) 90,81.061 90.5,81.561 90.5,85.2 91.15,85.85 100.15,85.85 104.51,90.21 104.51,92.432 v2(104.5,92.443)
MCU_OSC_IN: C5.2 U2.5 X1.1 | length 12.8
  L1 (Signal) w0.2: X1.1 85.7,76.05 86.15,76.5 86.15,76.6 86.75,77.2 86.75,78.5 86.5,78.75 86.5,81.5 87.411,82.411 U2.5
MCU_OSC_OUT: R2.2 U2.6 | length 4.2
  L1 (Signal) w0.2: R2.2 89,81.05 89.2,81.25 89.25,81.25 89.911,81.911 U2.6
MCU_PA4: J3.2 U2.14 | length 15.9
  L1 (Signal) w0.25: J3.2@88.5,65.025 J3.2 88.375,65.425 89.25,66.3 89.25,72.75 93.968,77.468 U2.14
MCU_PA5: J3.3 U2.15 | length 15.5
  L1 (Signal) w0.25: J3.3@89.75,65.025 J3.3 89.625,65.425 90.5,66.3 90.5,72.75 94.468,76.718 U2.15
MCU_PA6: J3.4 U2.16 | length 15.2
  L1 (Signal) w0.25: J3.4@90.75,65.025 J3.4 90.875,65.425 91.5,66.05 91.5,71.75 94.968,75.218 U2.16
MCU_PA7: J3.5 U2.17 | length 14.9
  L1 (Signal) w0.25: J3.5@92.25,65.025 J3.5 92.125,65.425 93,66.3 93,70.5 95.468,72.968 U2.17
MCU_SWCLK: J2.4 U2.37 | length 9.5
  L1 (Signal) w0.25: U2.37 98.968,86.468 99.5,87 103.25,87 104.5,88.25 J2.4
MCU_SWDIO: J2.2 U2.34 | length 11.9
  L1 (Signal) w0.25: U2.34 104.161,83.411 105.77,85.02 J2.2
MCU_SWO: J2.6 U2.39 | length 9
  L1 (Signal) w0.25: U2.39 97.968,86.468 99.75,88.25 102.75,88.25 103.25,88.75 103.25,90.095 J2.6
MCU_VCAP1: C13.2 U2.22 | length 1.6
  L1 (Signal) w0.25: 97.968,77.782 U2.22
  L1 (Signal) w0.3: C13.2 C13.2@97.968,76.968 ; 97.968,77.782 C13.2@97.968,76.968 ; C13.2@98,77 C13.2@97.968,76.968
USB_D_N: J1.2 U2.32 | length 10.2
  L1 (Signal) w0.26: U2.32 99.883,82.411 99.901,82.429 100.593,82.429 100.879,82.143 109.597,82.143 J1.2
USB_D_P: J1.3 U2.33 | length 10.2
  L1 (Signal) w0.26: U2.33 99.883,82.911 99.901,82.893 100.784,82.893 101.07,82.607 109.597,82.607 J1.3
VBUS: C1.2 FB1.1 J1.1
XTAL_IN: C6.2 R2.1 X1.3 | length 3.1
  L1 (Signal) w0.2: X1.3 88,78.05 C6.2 R2.1
pads on no net: J1.4 J1.6 J1.7 J1.8 J1.9 J1.10 J1.11 J2.MH J3. U2.2 U2.3 U2.4 U2.10 U2.11 U2.12 U2.13 U2.18 U2.19 U2.20 U2.21 U2.25 U2.27 U2.28 U2.29 U2.30 U2.31 U2.38 U2.40 U2.41 U2.46 U3.2 U3.3 U3.4 U3.5 U3.6 U3.7 U3.14 U3.15 U3.16 U3.17 U3.19 U3.21 U3.22

## Polygon pours and split planes (outlines as drawn)
+5V on L1 (Signal) "+5V_L01_P005" (solid, pour order 5): 105.1,79.2 102.5,76.6 101.9,76.6 99.55,74.25 98.8,74.25 98.8,70 99,69.8 100.4,69.8 100.7,70.1 100.7,72.4 101.4,72.4 101.7,72.7 101.8,72.7 101.8,74.2 104.4,76.4 104.4,77.6 105.1,78.3 105.3,78.1 106.3,78.1 106.4,78.2 106.4,80.7 106.2,80.9 105.3,80.9 105.1,80.7
GND on L1 (Signal) "GND_L01_P013" (solid, pour order 13): 108,67.75 108.25,68 108.25,70 107.75,70.5 106,70.5 106,70.25 105.25,70.25 105,70.5 105,74.5 106.25,75.75 107.25,75.75 108.25,76.75 108.25,77.5 108,77.75 105.25,77.75 105,77.5 105,75.75 103.75,74.5 102.5,74.5 102.25,74.25 102.25,72.75 103.5,71.5 103.5,69.5 103.825,69.175 105.325,69.175 106.25,68.25 106.25,68 106.5,67.75 106.75,67.75
+3V3 on L1 (Signal) "+3V3_L01_P008" (solid, pour order 8): 103.4,63.1 103.8,63.5 103.8,64.4 104.6,65.2 107.9,65.2 108.6,65.9 108.6,66.8 108,67.4 103.1,67.4 102.7,67.8 102.7,71.2 102.5,71.4 101.5,71.4 101,70.9 101,67.2 100,66.2 100,63.5 100.4,63.1
VBUS on L1 (Signal) "VBUS_L01_P000" (solid, pour order 0): 106.9,81.7 106.6,81.4 106.6,78.2 106.7,78.1 107.7,78.1 107.9,78.3 107.9,80.7 108.2,80.7 108.6,81.1 110.4,81.1 110.5,81.2 110.5,81.6 110.4,81.7 109.8,81.7
GND on L2 (GND) "GND_L02_P009" (solid, pour order 9): 78.75,94 cw(c81,94) 81,96.25 110.96,96.25 cw(c110.96,93.71) 113.5,93.71 113.5,63.54 cw(c110.96,63.54) 110.96,61 79.75,61 cw(c79.75,62) 78.75,62
GND on L3 (GND) "GND_L03_P010" (solid, pour order 10): 78.82,93.863 cw(c81.07,93.863) 81.07,96.113 111.03,96.113 cw(c111.03,93.573) 113.57,93.573 113.57,63.403 cw(c111.03,63.403) 111.03,60.863 79.82,60.863 cw(c79.82,61.863) 78.82,61.863

## Silkscreen, mask and mechanical layers (free items; w line width, h text height)
Top Overlay:
  text "SWD" at 100.35,86.95 h1.25
  text "USB" at 109.901,76.6 h1.2
  text "GPIO" at 88.9,66.9 h1.2
Mechanical 1:
  lines w0.254: 78,63 ccw(c81,63) 81,60 ; 78,94.391 cw(c80.609,94.391) 80.609,97 ; 111,60 ccw(c111,63) 114,63 ; 111,97 cw(c111,94) 114,94
  lines w0.3: 78,63 78,94.391 ; 80.609,97 111,97 ; 81,60 111,60 ; 114,63 114,94

## Text inside footprints (layer, text, board x,y; h text height)
D1: Mechanical 13 "+" at 109.292,64.917 h0.5 r90
D2: Mechanical 13 "+" at 100.371,79.981 h0.5